# EAGLE board Control Card Layout (EAGLE 7.6.0)
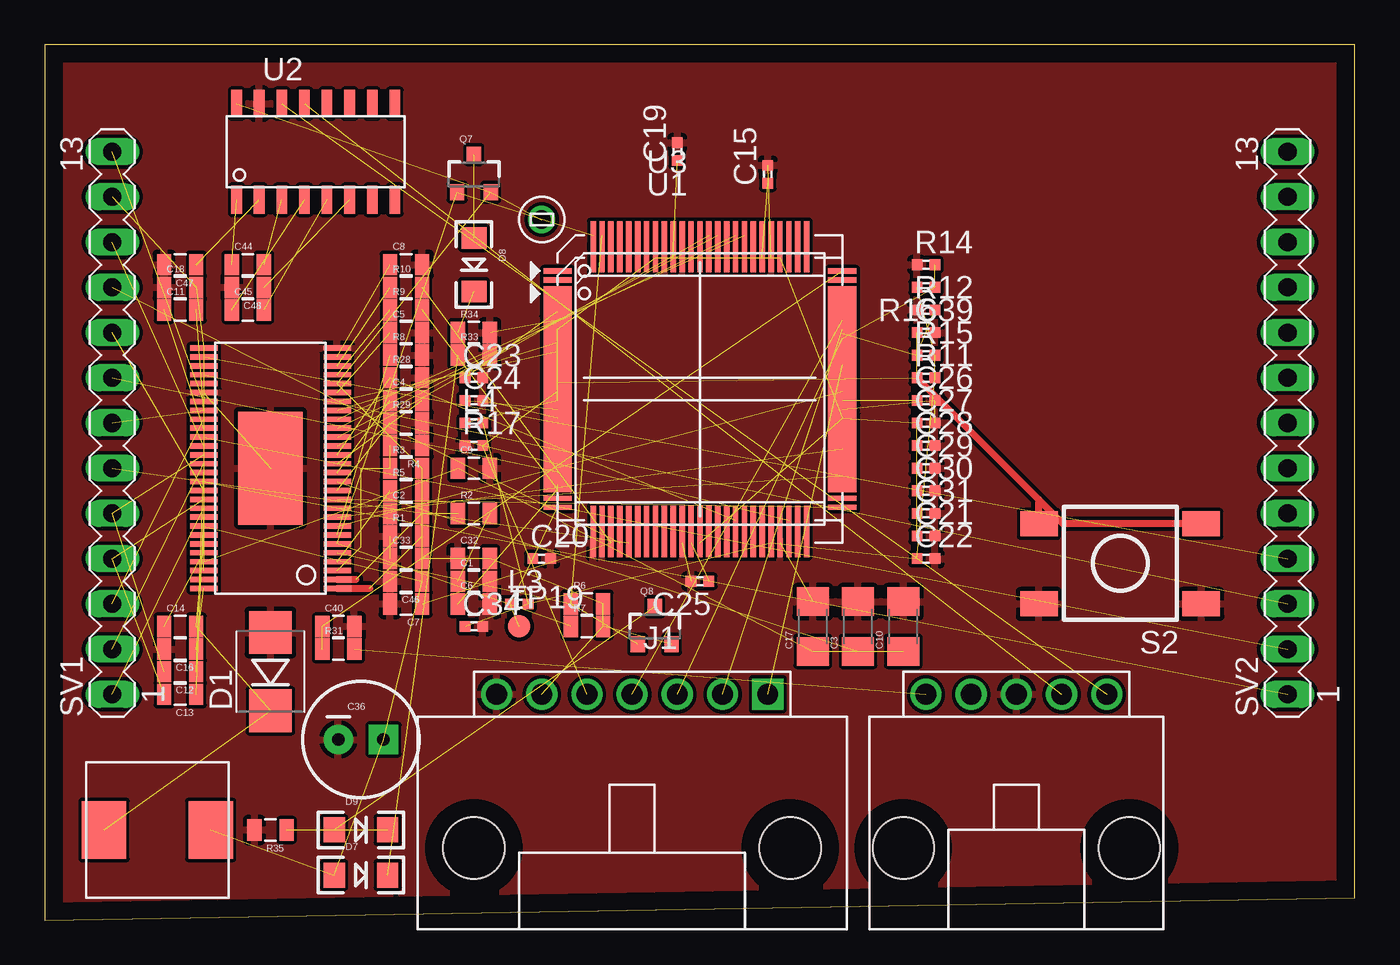
[diagram p0: board, top side]

Size 73.64 x 49.2 mm. Coordinates in mm from the lower left corner, seen from the top.
Outline: 0,0 73.64,1.27 73.64,49.2 0,49.2 0,0
Copper layers (1*16): Top 0.035mm / dielectric 1.5mm / Bottom 0.035mm
Design rules "default": minimum track width 10mil, minimum drill 24mil, track to track 8mil, track to pad 8mil, pad to pad 8mil, via to via 8mil, smd to smd 8mil, copper to edge 40mil, drill to drill 8mil, minimum pad ring 10mil, minimum via ring 8mil, stop-mask expansion 4mil, vias tented up to drill 0mil, thermal gap 10mil
Net classes: 0 default: width 0.152 mm, drill 0.305 mm, clearance 0.152 mm

## Footprints (pad centres in the part's own frame; a part is rotated, then mirrored left to right if it is on the bottom)
0805 = smd 0.8 x 1.2: 1 -0.9,0; 2 0.9,0
1206 = smd 1.6 x 1.8: 1 -1.4,0; 2 1.4,0
C0402 = smd 0.6 x 0.6: 1 -0.5,0; 2 0.5,0
CPOL-RADIAL-100UF-25V = drill 0.7 pad 1.651 square: 1 1.27,0 | drill 0.7 pad 1.651: 2 -1.27,0
SMB-DIODE = smd 2.4 x 2.4: A 2.2,0; C -2.2,0
LED-1206 = smd 1.2 x 1.4: A -1.5,0; C 1.5,0
MOLEX-70551-0006 = drill 1.168 square: 1 -7.62,0 | drill 1.168: 2 -5.08,0; 3 -2.54,0; 4 0,0; 5 2.54,0; 6 5.08,0; 7 7.62,0 | hole 3.454: -8.89,8.636; 8.89,8.636
R0402 = smd 0.6 x 0.6: 1 -0.5,0; 2 0.5,0
SOT23-3 = smd 0.8 x 0.9: 1 -0.95,-1; 2 0.95,-1; 3 0,1.1
FSMJSMA = smd 1.397 x 2.108: P$1 0,0; P$2 0,-9.119; P$3 4.496,0; P$4 4.496,-9.119
MA13-1 = drill 1.016 long: 1 -15.24,0; 2 -12.7,0; 3 -10.16,0; 4 -7.62,0; 5 -5.08,0; 6 -2.54,0; 7 0,0; 8 2.54,0; 9 5.08,0; 10 7.62,0; 11 10.16,0; 12 12.7,0; 13 15.24,0
TESTPAD_B1,27 = smd 1.27 x 1.27: TP 0,0
PQFP100 = smd 1.6 x 0.3: 1 -8,6; 2 -8,5.5; 3 -8,5; 4 -8,4.5; 5 -8,4; 6 -8,3.5; 7 -8,3; 8 -8,2.5; 9 -8,2; 10 -8,1.5; 11 -8,1; 12 -8,0.5; 13 -8,0; 14 -8,-0.5; 15 -8,-1; 16 -8,-1.5; 17 -8,-2; 18 -8,-2.5; 19 -8,-3; 20 -8,-3.5; 21 -8,-4; 22 -8,-4.5; 23 -8,-5; 24 -8,-5.5; 25 -8,-6; 51 8,-6; 52 8,-5.5; 53 8,-5; 54 8,-4.5; 55 8,-4; 56 8,-3.5; 57 8,-3; 58 8,-2.5; 59 8,-2; 60 8,-1.5; 61 8,-1; 62 8,-0.5; 63 8,0; 64 8,0.5; 65 8,1; 66 8,1.5; 67 8,2; 68 8,2.5; 69 8,3; 70 8,3.5; 71 8,4; 72 8,4.5; 73 8,5; 74 8,5.5; 75 8,6 | smd 0.3 x 1.6: 26 -6,-8; 27 -5.5,-8; 28 -5,-8; 29 -4.5,-8; 30 -4,-8; 31 -3.5,-8; 32 -3,-8; 33 -2.5,-8; 34 -2,-8; 35 -1.5,-8; 36 -1,-8; 37 -0.5,-8; 38 0,-8; 39 0.5,-8; 40 1,-8; 41 1.5,-8; 42 2,-8; 43 2.5,-8; 44 3,-8; 45 3.5,-8; 46 4,-8; 47 4.5,-8; 48 5,-8; 49 5.5,-8; 50 6,-8; 76 6,8; 77 5.5,8; 78 5,8; 79 4.5,8; 80 4,8; 81 3.5,8; 82 3,8; 83 2.5,8; 84 2,8; 85 1.5,8; 86 1,8; 87 0.5,8; 88 0,8; 89 -0.5,8; 90 -1,8; 91 -1.5,8; 92 -2,8; 93 -2.5,8; 94 -3,8; 95 -3.5,8; 96 -4,8; 97 -4.5,8; 98 -5,8; 99 -5.5,8; 100 -6,8
SOIC16 = smd 0.6 x 1.55: 1 -4.445,-2.7; 2 -3.175,-2.7; 3 -1.905,-2.7; 4 -0.635,-2.7; 5 0.635,-2.7; 6 1.905,-2.7; 7 3.175,-2.7; 8 4.445,-2.7; 9 4.445,2.7; 10 3.175,2.7; 11 1.905,2.7; 12 0.635,2.7; 13 -0.635,2.7; 14 -1.905,2.7; 15 -3.175,2.7; 16 -4.445,2.7
DCA = smd 0.3 x 1.55: 1 -6.75,-3.75; 2 -6.25,-3.75; 3 -5.75,-3.75; 4 -5.25,-3.75; 5 -4.75,-3.75; 6 -4.25,-3.75; 7 -3.75,-3.75; 8 -3.25,-3.75; 9 -2.75,-3.75; 10 -2.25,-3.75; 11 -1.75,-3.75; 12 -1.25,-3.75; 13 -0.75,-3.75; 14 -0.25,-3.75; 15 0.25,-3.75; 16 0.75,-3.75; 17 1.25,-3.75; 18 1.75,-3.75; 19 2.25,-3.75; 20 2.75,-3.75; 21 3.25,-3.75; 22 3.75,-3.75; 23 4.25,-3.75; 24 4.75,-3.75; 25 5.25,-3.75; 26 5.75,-3.75; 27 6.25,-3.75; 28 6.75,-3.75; 29 6.75,3.75; 30 6.25,3.75; 31 5.75,3.75; 32 5.25,3.75; 33 4.75,3.75; 34 4.25,3.75; 35 3.75,3.75; 36 3.25,3.75; 37 2.75,3.75; 38 2.25,3.75; 39 1.75,3.75; 40 1.25,3.75; 41 0.75,3.75; 42 0.25,3.75; 43 -0.25,3.75; 44 -0.75,3.75; 45 -1.25,3.75; 46 -1.75,3.75; 47 -2.25,3.75; 48 -2.75,3.75; 49 -3.25,3.75; 50 -3.75,3.75; 51 -4.25,3.75; 52 -4.75,3.75; 53 -5.25,3.75; 54 -5.75,3.75; 55 -6.25,3.75; 56 -6.75,3.75 | smd 6.35 x 3.61: P$2 0,0
5PIN = drill 1.168: 1 5.08,0; 2 2.54,0; 3 0,0; 4 -2.54,0; 5 -5.08,0 | hole 3.454: -6.35,8.636; 6.35,8.636
TEST_POINT_0.1INDIAM = drill 1.016: P$1 0,0
INDUCTOR_DR74 = smd 2.5 x 3.25: P$1 -3,0; P$2 3,0

## Placement (x,y rotation side)
C1  6800p  [0805]  24.13,19.05 0 top
C2  120p  [0805]  20.32,22.86 0 top
C3  2.2u  [1206]  45.72,16.51 90 top
C4  .022u  [0805]  20.32,29.21 0 top
C5  1u  [0805]  20.32,33.02 0 top
C6  2200p  [0805]  24.13,17.78 0 top
C7  2200p  [0805]  20.32,17.78 180 top
C8  1u  [0805]  20.32,36.83 0 top
C9  0.1u  [0805]  24.13,25.4 0 top
C10  4.7u  [1206]  48.26,16.51 90 top
C11  0.1u  [0805]  7.62,34.29 0 top
C12  0.1u  [0805]  7.62,13.97 180 top
C13  0.1u  [0805]  7.62,12.7 180 top
C14  0.1u  [0805]  7.62,16.51 0 top
C15  2.2u  [C0402]  40.64,41.91 90 top
C16  0.015u  [0805]  7.62,15.24 180 top
C17  4.7u  [1206]  43.18,16.51 90 top
C18  0.1u  [0805]  7.62,35.56 0 top
C19  2.2u  [C0402]  35.56,43.18 90 top
C20  2.2u  [C0402]  27.94,20.32 0 top
C21  2.2u  [C0402]  49.53,21.59 0 top
C22  2.2u  [C0402]  49.53,20.32 0 top
C23  2.2u  [C0402]  24.13,30.48 0 top
C24  2.2u  [C0402]  24.13,29.21 0 top
C25  2.2u  [C0402]  36.83,19.05 180 top
C26  2.2u  [C0402]  49.53,29.21 0 top
C27  2.2u  [C0402]  49.53,27.94 0 top
C28  2.2u  [C0402]  49.53,26.67 0 top
C29  2.2u  [C0402]  49.53,25.4 0 top
C30  2.2u  [C0402]  49.53,24.13 0 top
C31  2.2u  [C0402]  49.53,22.86 0 top
C32  1u  [0805]  24.13,20.32 0 top
C33  0.1u  [0805]  20.32,20.32 0 top
C34  0.1u  [C0402]  24.13,16.51 0 top
C36  47u  [CPOL-RADIAL-100UF-25V]  17.78,10.16 0 top
C39  0.1u  [C0402]  49.53,33.02 0 top
C40  .015u  [0805]  16.51,16.51 0 top
C44  0.1u  [0805]  11.43,36.83 0 top
C45  0.1u  [0805]  11.43,34.29 0 top
C46  0.1u  [0805]  20.32,19.05 180 top
C47  0.1u  [0805]  7.62,36.83 180 top
C48  0.1u  [0805]  11.43,35.56 180 top
D1  DIODE-ZENERSMB  [SMB-DIODE]  12.7,13.97 90 top
D7  [LED-1206]  17.78,2.54 0 top
D8  [LED-1206]  24.13,36.83 270 top
D9  [LED-1206]  17.78,5.08 0 top
J1  SL07-HORIZ  [MOLEX-70551-0006]  33.02,12.7 180 top
L3  BKP1005HS221-T  [R0402]  26.67,17.78 0 top
L4  BLM15PD600SN1D  [R0402]  24.13,27.94 0 top
Q7  MOSFET-PCHANNEL  [SOT23-3]  24.13,41.91 0 top
Q8  MOSFET-PCHANNEL  [SOT23-3]  34.29,16.51 0 top
R1  205k  [0805]  20.32,21.59 0 top
R2  16.2k  [0805]  24.13,22.86 0 top
R3  31.6k  [0805]  20.32,25.4 0 top
R4  10k  [0805]  20.32,26.67 180 top
R5  10k  [0805]  20.32,24.13 0 top
R6  10k  [0805]  30.48,17.78 0 top
R7  10k  [0805]  30.48,16.51 0 top
R8  150k  [0805]  20.32,31.75 0 top
R9  56  [0805]  20.32,34.29 0 top
R10  56  [0805]  20.32,35.56 0 top
R11  2.2k  [R0402]  49.53,30.48 0 top
R12  2.2k  [R0402]  49.53,34.29 0 top
R14  2.2k  [R0402]  49.53,36.83 0 top
R15  820  [R0402]  49.53,31.75 0 top
R16  820  [R0402]  49.53,35.56 180 top
R17  2.2k  [R0402]  24.13,26.67 0 top
R28  1k  [0805]  20.32,30.48 0 top
R29  1k  [0805]  20.32,27.94 0 top
R31  100  [0805]  16.51,15.24 0 top
R33  330  [0805]  24.13,31.75 0 top
R34  330  [0805]  24.13,33.02 0 top
R35  330  [0805]  12.7,5.08 180 top
S2  TP-1138K9-BE1125  [FSMJSMA]  55.88,17.78 90 top
SV1  [MA13-1]  3.81,27.94 90 top
SV2  [MA13-1]  69.85,27.94 90 top
TP19  TESTPAD_TPB1,27  [TESTPAD_B1,27]  26.67,16.51 0 top
U1  TMS320F28069MPZT  [PQFP100]  36.83,29.21 0 top
U2  MAX3232D  [SOIC16]  15.24,43.18 0 top
U3  TMS320F28069MPZT  [PQFP100]  36.83,30.48 0 top
U$1  DRV8301  [DCA]  12.7,25.4 90 top
U$4  5PIN  [5PIN]  54.61,12.7 180 top
U$10  TEST_POINT_0.1INDIAM  [TEST_POINT_0.1INDIAM]  27.94,39.37 0 top
U$14  33u  [INDUCTOR_DR74]  6.35,5.08 0 top

## Library data of the parts
C1-C14 C16-C18 C32 C33 C36 C40 C44-C48 R1-R10 R28 R29 R31 R33-R35 = SparkFun-Passives
C15 C19-C31 C34 C39 L3 L4 R11 R12 R14-R17 = rcl
D1 = SparkFun-DiscreteSemi
D7-D9 = SparkFun-LED
J1 U$10 = MRDT-Connectors
Q7 Q8 = SparkFun-DiscreteSemi; PROD_ID: TRANS-08285
S2 = switch
SV1 SV2 = con-lstb; OC_FARNELL: unknown; OC_NEWARK: unknown
TP19 = RF430FRL152H_EVM_a
U1 U3 = LAUNCHXL-F28027
U2 = MRDT-ICs; OPERATING_VOLTAGE: 3V3
U$1 = DRV8301
U$4 = Molex-SL
U$14 = Inductor_DR74

## Nets
232_RX: U2.13 U$4.4
232_TX: U2.14 U$4.5
+3V3: C22.1 C34.1 L3.2 L4.2 R11.2 R15.2 R16.2 U1.46
ASENSE: SV1.10 U1.29
BSENSE: SV1.8 U1.21
CSENSE: SV1.6 U1.30
DC_CAL: R29.1 U3.48 U$1.12
EN_GATE: R28.1 U3.42 U$1.16
GH_A: SV1.1 U$1.47
GH_B: SV1.2 U$1.42
GH_C: SV1.3 U$1.37
GL_A: SV1.9 U$1.45
GL_B: SV1.11 U$1.40
GL_C: SV1.13 U$1.35
GND: C1.2 C2.1 C3.2 C5.2 C6.2 C7.2 C8.2 C9.2 C10.2 C15.2 C16.2 C17.2 C18.1 C19.2 C20.2 C21.2 C22.2 C23.2 C24.2 C25.2 C26.2 C27.2 C28.2 C29.2 C30.2 C31.2 C32.1 C33.1 C34.2 C36.2 C39.2 C40.2 C46.2 C47.2 C48.2 D1.A J1.7 R1.1 R4.1 R8.2 R12.1 R14.1 R17.1 R28.2 R29.2 R33.2 R34.2 R35.2 S2.P$1 S2.P$2 U1.4 U1.15 U1.26 U1.27 U1.36 U1.47 U1.62 U1.80 U1.90 U1.92 U2.15 U$1.28 U$1.34 U$1.P$2 U$4.3
GPIO34: R12.2 R15.1 U3.68
INH_A: U3.87 U$1.17
INH_B: U3.84 U$1.19
INH_C: U3.9 U$1.21
INL_A: U3.86 U$1.18
INL_B: U3.83 U$1.20
INL_C: U3.10 U$1.22
N$1: C2.2 R2.1 U$1.2
N$2: C1.1 R2.2
N$3: R3.1 R4.2 U$1.3
N$4: R1.2 U$1.1
N$5: R8.1 U$1.7
N$6: C4.1 U$1.14
N$7: C4.2 U$1.15
N$8: C3.1 U$1.13
N$9: C5.1 U$1.23
N$10: R9.1 U$1.25
N$11: R10.1 U$1.26
N$12: C8.1 U$1.27
N$13: C23.1 U1.3
N$14: C24.1 U1.14
N$15: C25.1 U1.37
N$16: C26.1 U1.63
N$17: C15.1 U1.81
N$21: C11.1 U$1.38
N$24: D7.C R33.1
N$25: C12.1 U$1.43
N$26: D8.C R34.1
N$27: D9.C R35.1
N$28: D9.A Q8.3
N$29: C13.1 U$1.48
N$30: C14.1 U$1.52
N$31: C14.2 D1.C U$1.50 U$1.51 U$14.P$1
N$32: D8.A Q7.3
N$34: R31.2 U$4.1
N$35: C16.1 U$1.56
N$36: C19.1 U1.91
N$40: C44.1 U2.1
N$42: C44.2 U2.3
N$43: C45.1 U2.4
N$44: C45.2 U2.5
N$45: C48.1 U2.6
N$46: C47.1 U2.2
NFAULT: Q7.1 R7.1 U3.100 U$1.6
NOCTW: Q8.1 R6.1 U3.99 U$1.5
NSCS: U1.64 U$1.8
PVDD: C9.1 C10.1 C17.1 C18.2 SV1.12 U$1.29 U$1.53 U$1.54
PVDDSENSE: U1.16
PWM_IN: C40.1 R31.1 U3.75
PWRGD: R5.1 U$1.4
RESET#: C39.1 R11.1 S2.P$3 S2.P$4 U1.11
SCLK: U1.51 U$1.11
SDI: U3.55 U$1.9
SDO: U3.52 U$1.10
SH_A: C13.2 SV1.4 U$1.46
SH_B: C12.2 SV1.5 U$1.41
SH_C: C11.2 SV1.7 U$1.36
SL_A: SV2.1 U$1.33 U$1.44
SL_B: SV2.2 U$1.31 U$1.39
SO1: C6.1 R9.2 U1.23
SO2: C7.1 R10.2 U1.28
SP1: SV2.3 U$1.32
SP2: SV2.4 U$1.30
TCK: J1.1 U1.67
TDI: J1.2 U1.71
TDO: J1.3 R14.2 R16.1 U1.70
TMS: J1.4 U1.72
TRST: J1.5 R17.2 U1.12
UART_RX: U2.12
UART_TX: U2.11
VART_RX: U3.50
VART_TX: U3.43
VCC: C32.2 C33.2 C36.1 C46.1 D7.A J1.6 Q7.2 Q8.2 R3.2 R5.2 R6.2 R7.2 U2.16 U$1.24 U$1.49 U$10.P$1 U$14.P$2
VDD1: U3.3
VDD2: U3.14
VDD3: U3.37
VDD4: U3.63
VDD5: U3.81
VDD6: U3.91
VDD_FL: U3.46
VDDA: C20.1 L3.1 TP19.TP U1.25 U3.25
VDDIO: C21.1 C27.1 C28.1 C29.1 C30.1 C31.1 L4.1 U1.5 U1.13 U1.38 U1.61 U1.79 U1.93
VDDIO1: U3.5
VDDIO2: U3.13
VDDIO3: U3.38
VDDIO4: U3.61
VDDIO5: U3.79
VDDIO6: U3.93
VSS1: U3.4
VSS2: U3.15
VSS3: U3.36
VSS4: U3.47
VSS5: U3.62
VSS6: U3.80
VSS7: U3.92
VSSA: U3.26

## Tracks (layer width: path | path; a pad name or v marks a point on that pad's centre or on a via)
232_RX  (1 unrouted)
232_TX  (1 unrouted)
+3V3  (7 unrouted)
ASENSE  (1 unrouted)
BSENSE  (1 unrouted)
CSENSE  (1 unrouted)
DC_CAL  (2 unrouted)
EN_GATE  (2 unrouted)
GH_A  (1 unrouted)
GH_B  (1 unrouted)
GH_C  (1 unrouted)
GL_A  (1 unrouted)
GL_B  (1 unrouted)
GL_C  (1 unrouted)
GND  (11 unrouted)
  pour Top: 0,49.53 0,0 73.66,0 73.66,49.53
GPIO34  (2 unrouted)
INH_A  (1 unrouted)
INH_B  (1 unrouted)
INH_C  (1 unrouted)
INL_A  (1 unrouted)
INL_B  (1 unrouted)
INL_C  (1 unrouted)
N$1  (2 unrouted)
  Top 0.406: U$1.2 17.51,19.15
N$2  (1 unrouted)
N$3  (4 unrouted)
N$4  (1 unrouted)
  Top 0.406: U$1.1 18.28,18.65
N$5  (1 unrouted)
N$6  (1 unrouted)
N$7  (1 unrouted)
N$8  (1 unrouted)
N$9  (1 unrouted)
N$10  (1 unrouted)
N$11  (1 unrouted)
N$12  (1 unrouted)
N$13  (1 unrouted)
N$14  (1 unrouted)
N$15  (1 unrouted)
N$16  (1 unrouted)
N$17  (1 unrouted)
N$21  (1 unrouted)
N$24  (1 unrouted)
N$25  (1 unrouted)
N$26  (1 unrouted)
N$27  (1 unrouted)
N$28  (1 unrouted)
N$29  (1 unrouted)
N$30  (1 unrouted)
N$31  (4 unrouted)
N$32  (1 unrouted)
N$34  (1 unrouted)
N$35  (1 unrouted)
N$36  (1 unrouted)
N$40  (1 unrouted)
N$42  (1 unrouted)
N$43  (1 unrouted)
N$44  (1 unrouted)
N$45  (1 unrouted)
N$46  (1 unrouted)
NFAULT  (3 unrouted)
NOCTW  (3 unrouted)
NSCS  (1 unrouted)
PVDD  (7 unrouted)
PWM_IN  (2 unrouted)
PWRGD  (1 unrouted)
RESET#  (2 unrouted)
  Top 0.406: S2.P$3 55.88,23.63 | 55.88,23.63 55.63,23.88 R11.1 | S2.P$4 57.23,22.28 55.88,23.63
SCLK  (1 unrouted)
SDI  (1 unrouted)
SDO  (1 unrouted)
SH_A  (2 unrouted)
SH_B  (2 unrouted)
SH_C  (2 unrouted)
SL_A  (2 unrouted)
SL_B  (2 unrouted)
SO1  (2 unrouted)
SO2  (2 unrouted)
SP1  (1 unrouted)
SP2  (1 unrouted)
TCK  (1 unrouted)
TDI  (1 unrouted)
TDO  (3 unrouted)
TMS  (1 unrouted)
TRST  (2 unrouted)
VCC  (16 unrouted)
VDDA  (4 unrouted)
VDDIO  (12 unrouted)